# EAGLE board bottom (EAGLE 7.7.0)

Size 150 x 100 mm. Coordinates in mm from the lower left corner, seen from the top.
Outline: 150,95 150,5 arc-90 145,0 5,0 arc-90 0,5 0,95 arc-90 5,100 145,100 arc-90 150,95
Copper layers (1*16): Top 0.035mm / dielectric 1.5mm / Bottom 0.035mm
Design rules "default": minimum track width 10mil, minimum drill 24mil, track to track 8mil, track to pad 8mil, pad to pad 8mil, via to via 8mil, smd to smd 8mil, copper to edge 40mil, drill to drill 8mil, minimum pad ring 10mil, minimum via ring 8mil, stop-mask expansion 4mil, vias tented up to drill 0mil, thermal gap 10mil
Holes 3.2 mm at 145,5 145,95 5,95 5,5 26,50 77,65 49,63
Holes 32 mm at 100,50

## Footprints (pad centres in the part's own frame; a part is rotated, then mirrored left to right if it is on the bottom)
RPI3-HOLE-ONLY = hole 2.8: 3.5,3.5; 61.5,3.5; 3.5,52.5; 61.5,52.5
BAR = hole 4.2: 59,9.5
SERVO-HOLES = hole 2.2: -4.5,-4.5; 4.5,-4.5; 4.5,4.5; -4.5,4.5 | hole 3.2: 0,0
DCDC_AKIZUKI = hole 2.8: 3,24; 3,3; 34,3; 34,24
AKIDUKI-UNI-BOARD = hole 2.2: 2.54,2.54; 2.54,20.32; 33.02,2.54; 33.02,20.32

## Placement (x,y rotation side)
U$1  RPI3-HOLE-ONLY  [RPI3-HOLE-ONLY]  142,61 180 top
U$2  SQUARE_LONG_HOLE  [SQUARE_LONG_HOLE]  35,3 0 top
U$3  SQUARE_LONG_HOLE  [SQUARE_LONG_HOLE]  115,3 0 top
U$4  SQUARE_LONG_HOLE  [SQUARE_LONG_HOLE]  75,3 0 top
U$5  SQUARE_LONG_HOLE  [SQUARE_LONG_HOLE]  95,3 0 top
U$6  SQUARE_LONG_HOLE  [SQUARE_LONG_HOLE]  35,97 0 top
U$7  SQUARE_LONG_HOLE  [SQUARE_LONG_HOLE]  55,97 0 top
U$8  SQUARE_LONG_HOLE  [SQUARE_LONG_HOLE]  75,97 0 top
U$9  SQUARE_LONG_HOLE  [SQUARE_LONG_HOLE]  95,97 0 top
U$10  SQUARE_LONG_HOLE  [SQUARE_LONG_HOLE]  115,97 0 top
U$12  BAR  [BAR]  149.5,-9 90 top
U$13  BAR  [BAR]  19.5,-9 90 top
U$14  SERVO-HOLES  [SERVO-HOLES]  125,50 0 top
U$15  SERVO-HOLES  [SERVO-HOLES]  40,50 0 top
U$16  SERVO-HOLES  [SERVO-HOLES]  125,25 0 top
U$17  SERVO-HOLES  [SERVO-HOLES]  125,75 0 top
U$18  DCDC-AKIZUKI  [DCDC_AKIZUKI]  2,64 0 top
U$19  AKIDUKI-BOARD8X13  [AKIDUKI-UNI-BOARD]  42,70 0 top
U$21  SQUARE_LONG_HOLE  [SQUARE_LONG_HOLE]  55,3 0 top

## Library data of the parts
U$1-U$10 U$21 = 0_Rpi3_RevA
U$12-U$19 = 0-chirimen

## Text on the board
tTest: 100mm | 150mm